# EAGLE board eGreenhousePCBpowerboost (EAGLE 9.1.0)
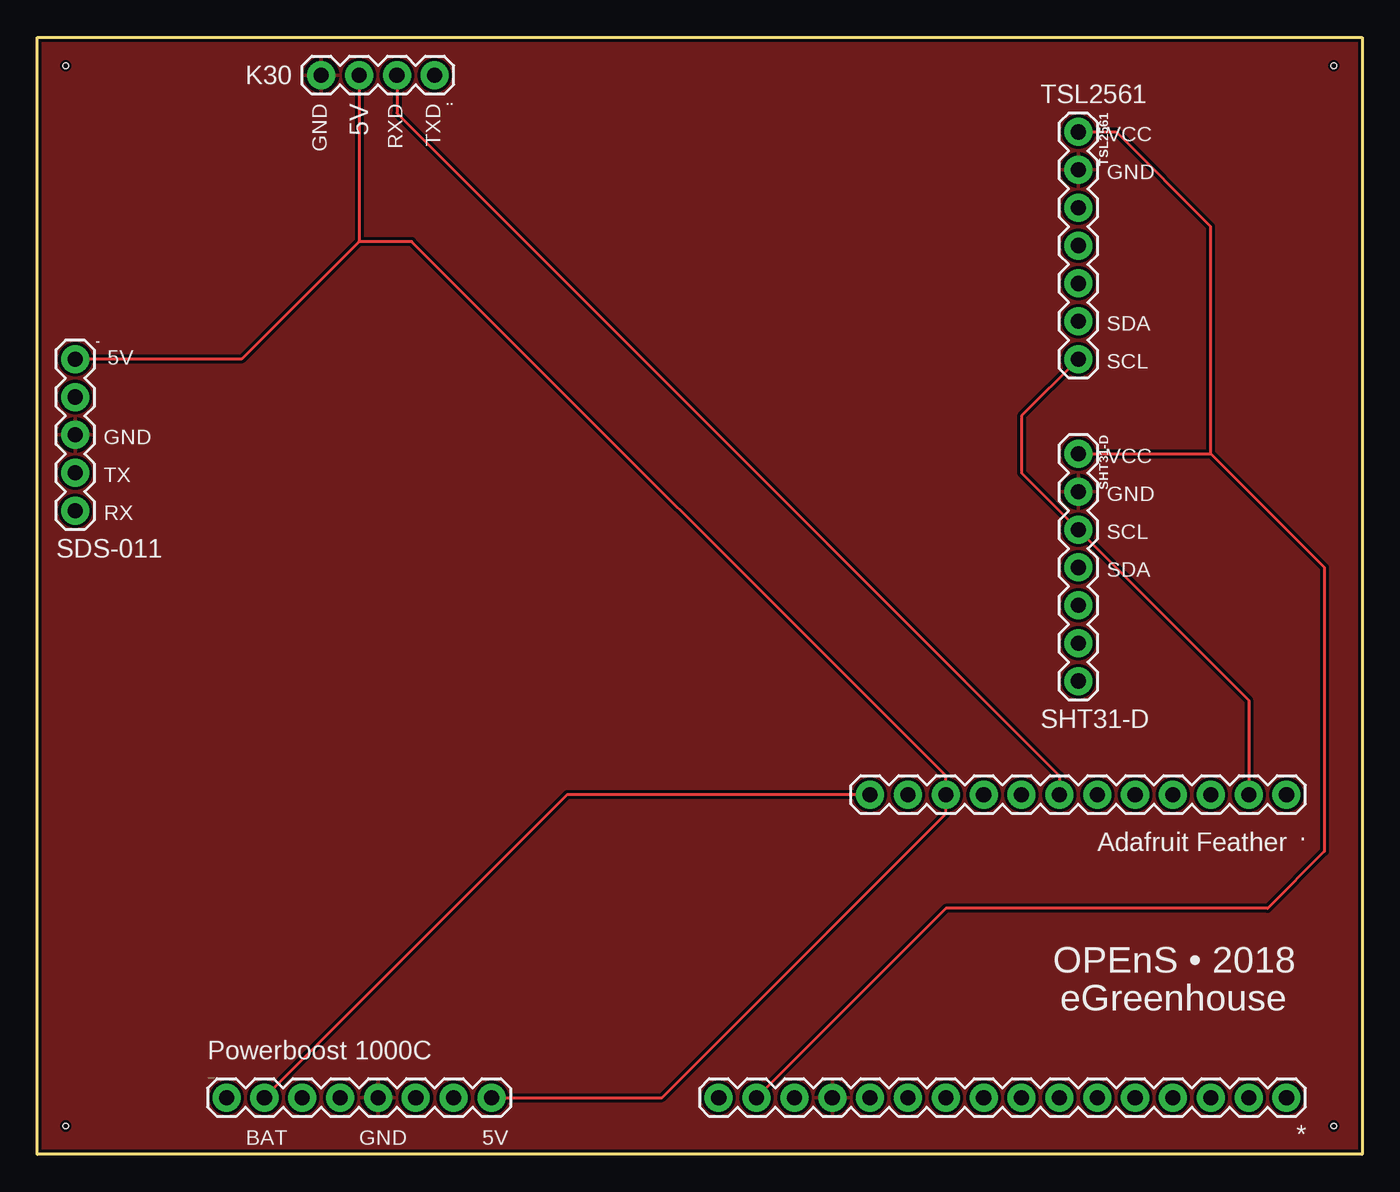
[diagram p0: board, top side]
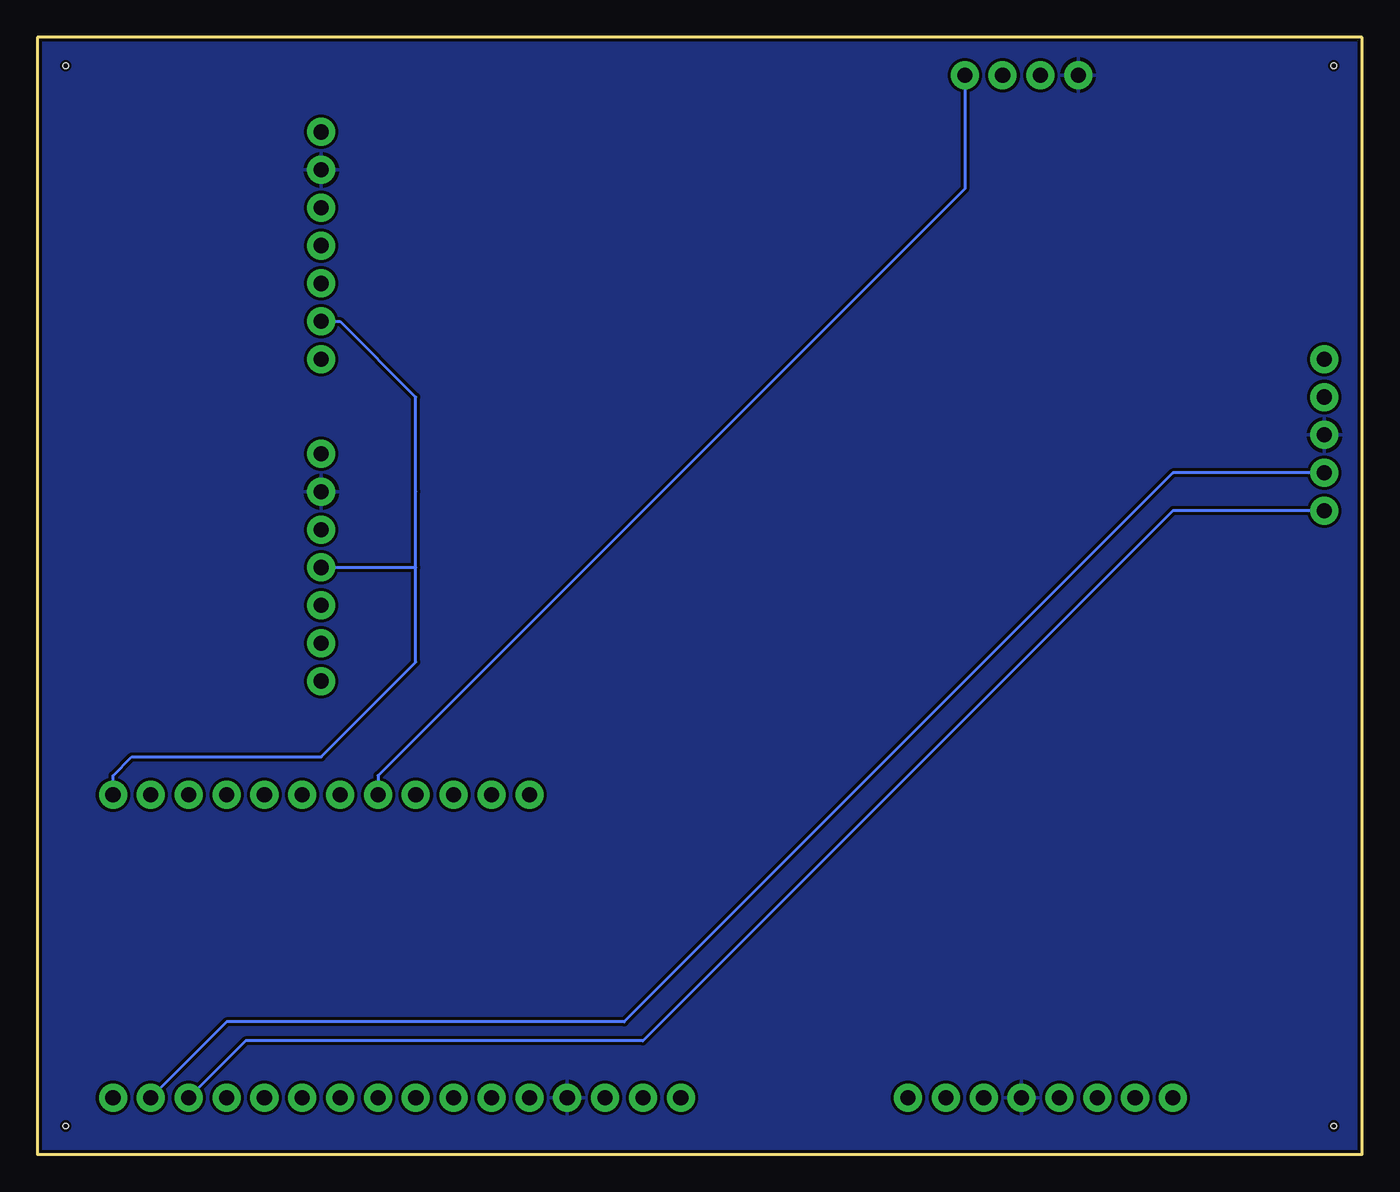
[diagram p1: board, bottom side, seen from below]

Size 88.9 x 74.93 mm. Coordinates in mm from the lower left corner, seen from the top.
Outline: 0,0 0,74.93 88.9,74.93 88.9,0 0,0
Copper layers (1*16): Top 0.035mm / dielectric 1.5mm / Bottom 0.035mm
Design rules "SparkFun": minimum track width 8mil, minimum drill 20mil, track to track 8mil, track to pad 8mil, pad to pad 8mil, via to via 8mil, smd to smd 8mil, copper to edge 8mil, drill to drill 8mil, minimum pad ring 12mil, minimum via ring 10mil, stop-mask expansion 4mil, vias tented up to drill 20mil, thermal gap 10mil
Holes 0.35 mm at 1.91,73.03 87,73.03 87,1.91 1.91,1.91

## Footprints (pad centres in the part's own frame; a part is rotated, then mirrored left to right if it is on the bottom)
1X05 = drill 1.016 pad 1.88: 1 0,0; 2 2.54,0; 3 5.08,0; 4 7.62,0; 5 10.16,0
1X16 = drill 1.016 pad 1.88: 1 0,0; 2 2.54,0; 3 5.08,0; 4 7.62,0; 5 10.16,0; 6 12.7,0; 7 15.24,0; 8 17.78,0; 9 20.32,0; 10 22.86,0; 11 25.4,0; 12 27.94,0; 13 30.48,0; 14 33.02,0; 15 35.56,0; 16 38.1,0
1X12 = drill 1.016 pad 1.88: 1 0,0; 2 2.54,0; 3 5.08,0; 4 7.62,0; 5 10.16,0; 6 12.7,0; 7 15.24,0; 8 17.78,0; 9 20.32,0; 10 22.86,0; 11 25.4,0; 12 27.94,0
1X04 = drill 1.016 pad 1.88: 1 0,0; 2 2.54,0; 3 5.08,0; 4 7.62,0
1X08 = drill 1.016 pad 1.88: 1 0,0; 2 2.54,0; 3 5.08,0; 4 7.62,0; 5 10.16,0; 6 12.7,0; 7 15.24,0; 8 17.78,0
1X07 = drill 1.016 pad 1.88: 1 0,0; 2 2.54,0; 3 5.08,0; 4 7.62,0; 5 10.16,0; 6 12.7,0; 7 15.24,0

## Placement (x,y rotation side)
'  [1X05]  2.54,53.34 270 top
*  [1X16]  83.82,3.81 180 top
.  [1X12]  83.82,24.13 180 top
..  [1X04]  26.67,72.39 180 top
_  [1X08]  12.7,3.81 0 top
SHT31-D  [1X07]  69.85,46.99 270 top
TSL2561  [1X07]  69.85,68.58 270 top

## Library data of the parts
' * . SHT31-D TSL2561 = SparkFun-Connectors
.. = SparkFun-Connectors; PROD_ID: CONN-09696
_ = SparkFun-Connectors; PROD_ID: CONN-08438

## Nets
5V: '.1 ..10 ...3 _.8
A0: *.12
A1: *.11
A2: *.10
A3: *.9
A4: *.8
A5: *.7
AREF: *.14
BAT: ..12 _.2
CE_P5: ..3
D6: ..4
D9: ..5
D10: ..6
D11: ..7 ...2
D12: ..8 ...1
D13: ..9
EN: ..11
GND: '.3 *.13 ...4 _.5 SHT31-D.2 TSL2561.2
MISO: *.4
MOSI: *.5
RST: *.16
RX: '.5 *.3
SCK: *.6
SCL: ..2 SHT31-D.3 TSL2561.7
SDA: ..1 SHT31-D.4 TSL2561.6
SPEC: *.1
TX: '.4 *.2
VCC: *.15 SHT31-D.1 TSL2561.1

## Tracks (layer width: path | path; a pad name or v marks a point on that pad's centre or on a via)
5V
  Top 0.203: '.1 13.7,53.34 21.59,61.23 | ...3 21.59,61.23 | 21.59,61.23 25.13,61.23 60.96,25.4 ..10 60.96,22.86 41.91,3.81 _.8
BAT
  Top 0.203: _.2 35.56,24.13 ..12
D11
  Top 0.203: ...2 24.13,69.85 68.58,25.4 ..7
D12
  Bottom 0.203: ...1 26.67,64.77 66.04,25.4 ..8
GND
  pour Top: 0,74.93 88.9,74.93 88.9,0 0,0
  pour Bottom: 0,74.93 88.9,74.93 88.9,0 0,0
  pour Top: 0,74.93 88.9,74.93 88.9,0 0,0
RX
  Bottom 0.203: '.5 12.7,43.18 29.21,26.67 48.26,7.62 74.93,7.62 *.3
SCL
  Top 0.203: TSL2561.7 66.04,49.53 66.04,45.72 SHT31-D.3 81.28,30.48 ..2
SDA
  Bottom 0.203: 63.5,44.45 63.5,50.8 68.58,55.88 TSL2561.6 | SHT31-D.4 63.5,39.37 63.5,44.45 | 63.5,44.45 63.5,33.02 69.85,26.67 82.55,26.67 83.82,25.4 ..1
TX
  Bottom 0.203: '.4 12.7,45.72 49.53,8.89 76.2,8.89 *.2
VCC
  Top 0.203: 78.74,46.99 78.74,62.23 72.39,68.58 TSL2561.1 | 78.74,46.99 72.39,46.99 SHT31-D.1 | *.15 60.96,16.51 82.55,16.51 86.36,20.32 86.36,39.37 78.74,46.99
  Bottom 0.203: 48.26,2.95 *.15

## Text on the board
tPlace: K30 | GND | 5V | RXD | TXD | TSL2561 | VCC | GND | SDA | 5V | SCL | GND | VCC | TX | GND | RX | SCL | SDS-011 | SDA | SHT31-D | Adafruit Feather | OPEnS • 2018 | eGreenhouse | Powerboost 1000C | BAT | GND | 5V